# Altium PCB dub.PcbDoc
Units mm, origin at the board's own origin, x right, y up, seen from the top; angles counter-clockwise.
Board outline 100 x 100 mm, 2 copper layers (Top Layer, Bottom Layer); 47 components, 32 nets, 135 pads, 0 vias.
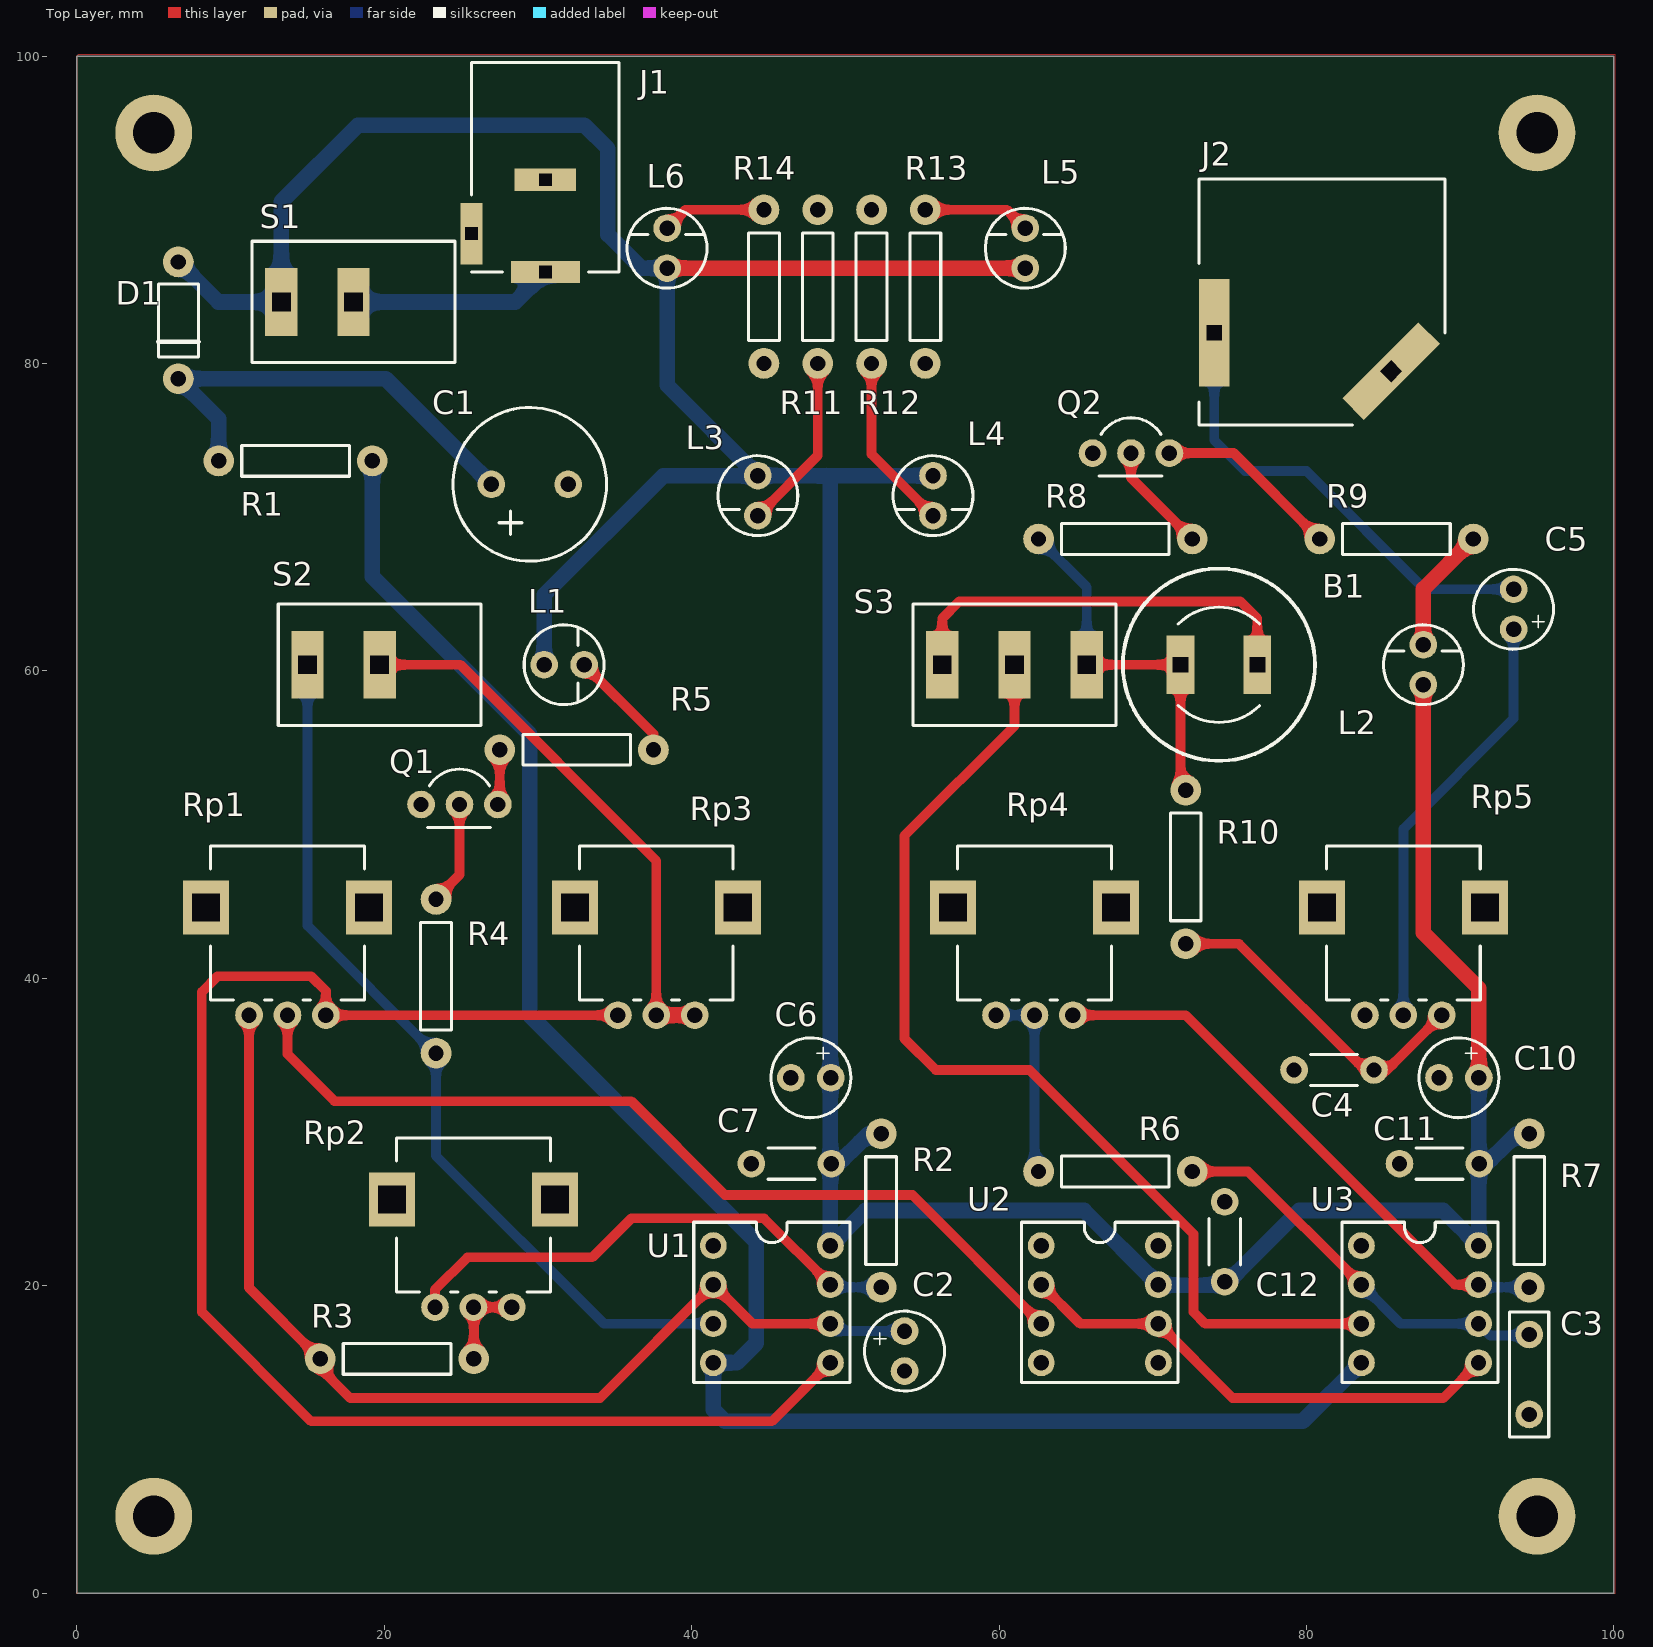
[diagram p0: Top Layer view]
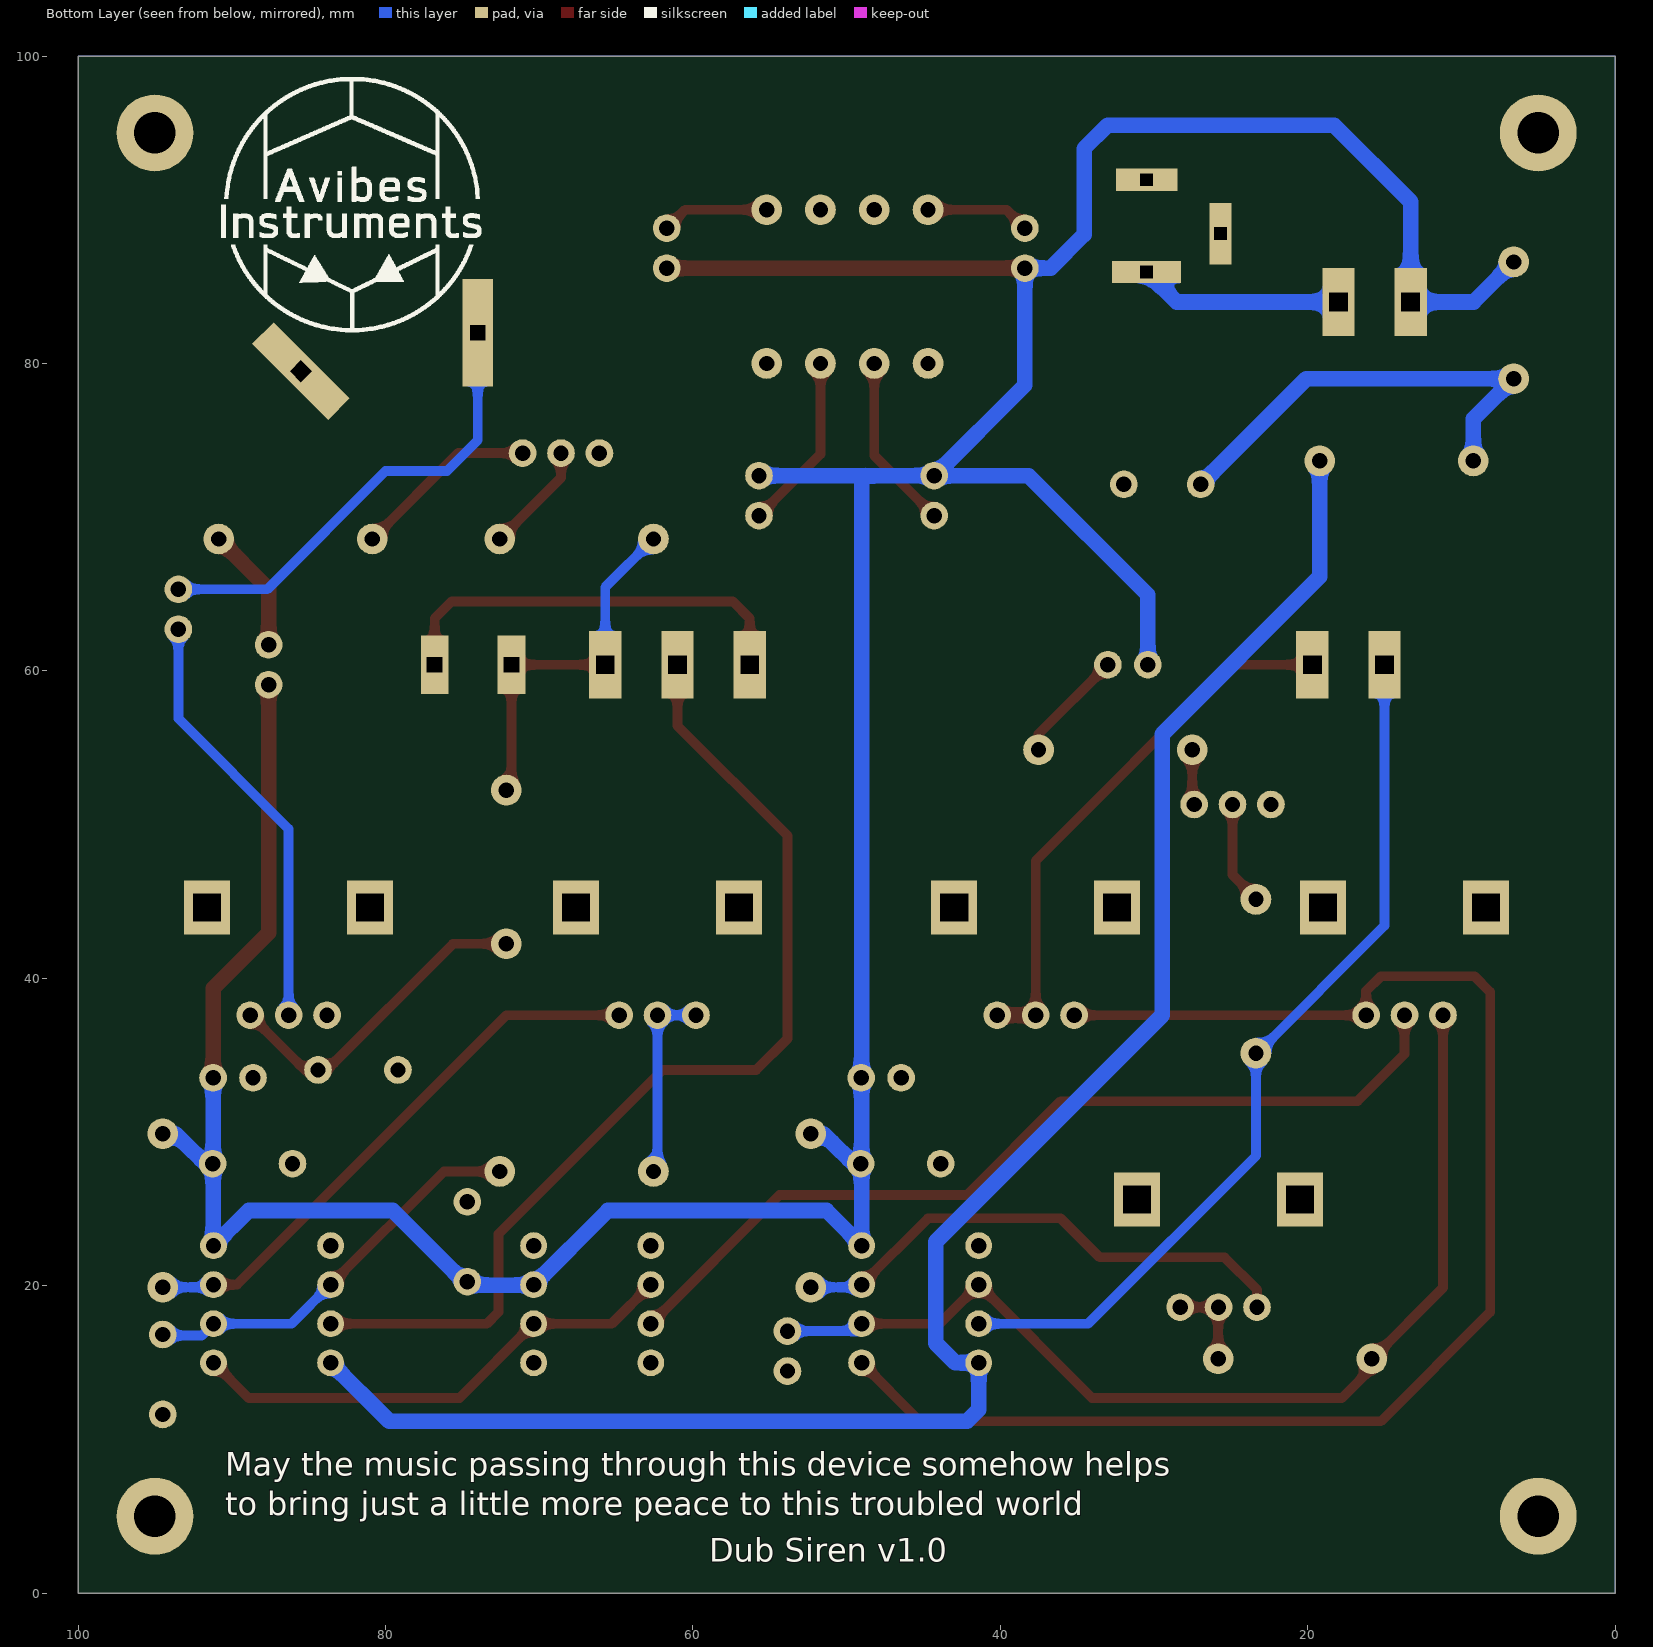
[diagram p1: Bottom Layer view, seen from below]
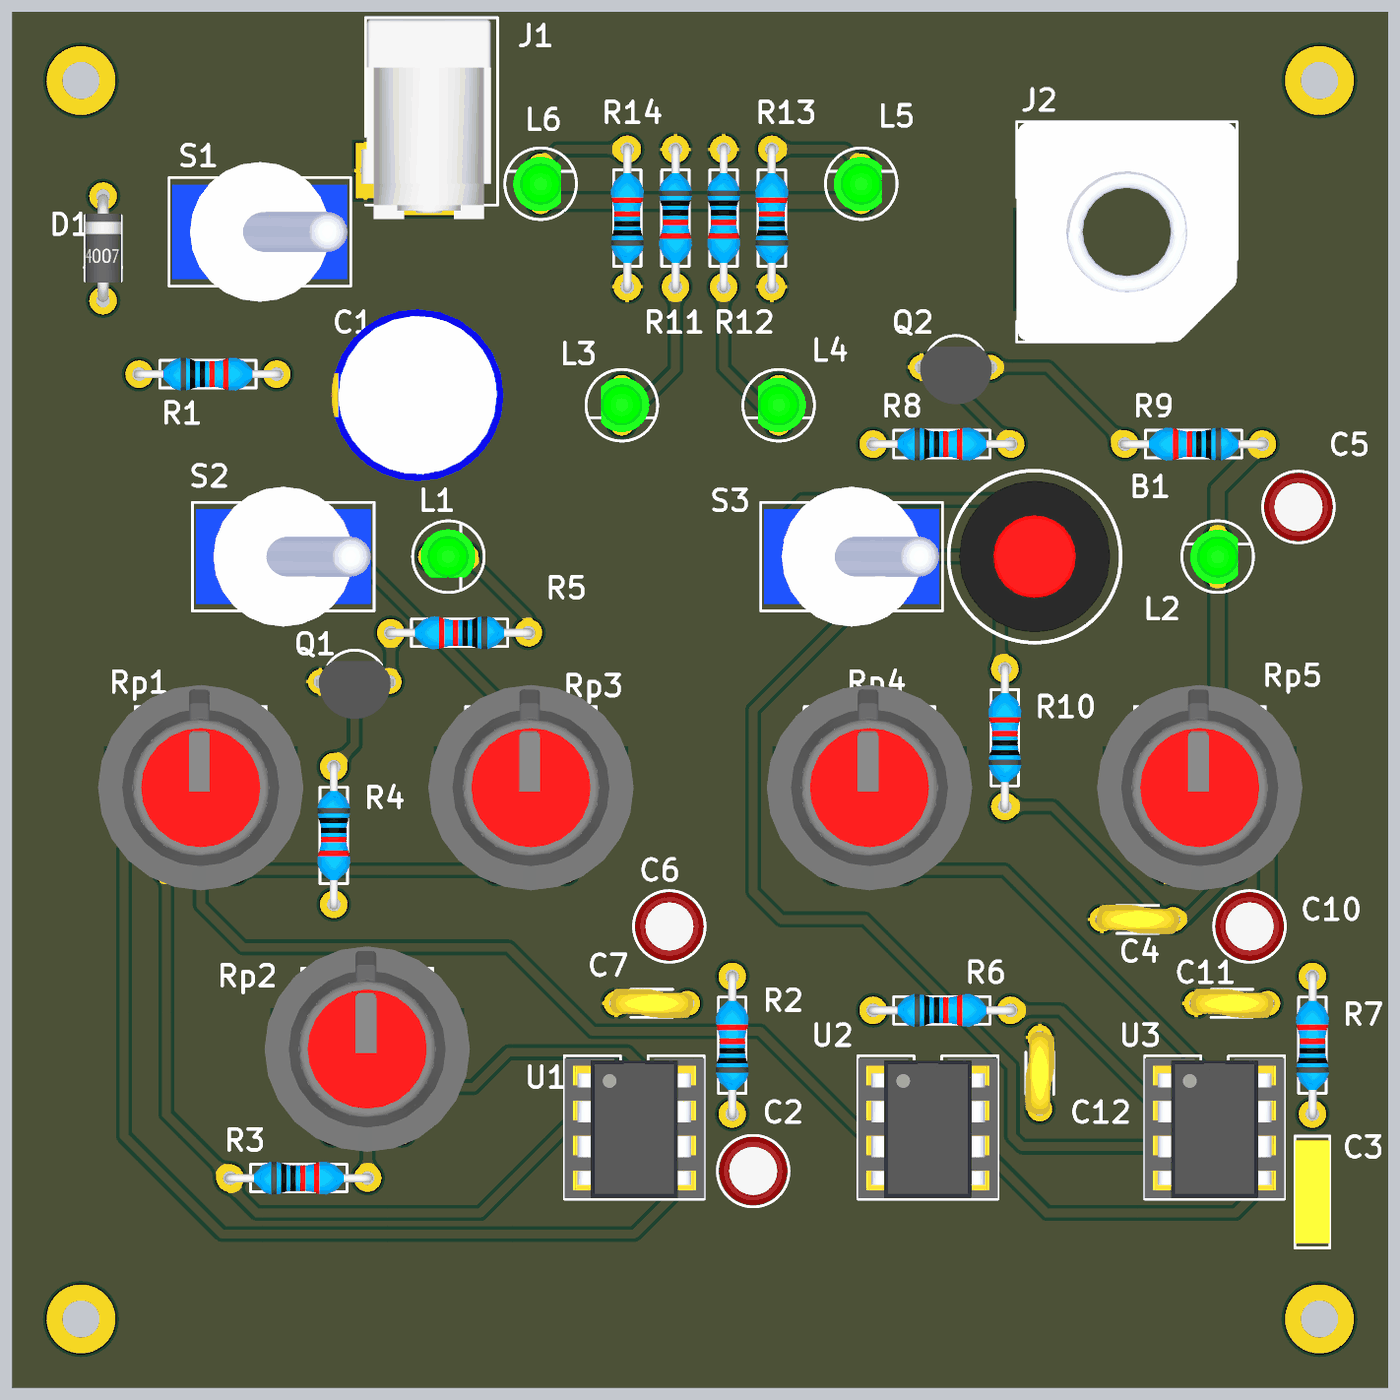
[diagram p2: 3D render of the assembled board from above, using the file's embedded part models]

## Layer stack, top to bottom
Top Solder: solder mask 0.0102, Solder Resist, Dk 3.5
Top Layer: signal copper 0.0356
Dielectric 1: dielectric 0.32, FR-4, Dk 4.8
Bottom Layer: signal copper 0.0356
Bottom Solder: solder mask 0.0102, Solder Resist, Dk 3.5

## Board outline
0,0 100,0 100,100 0,100

## Design rules (kind name [scope] priority, off if disabled: settings)
Clearance [All] p1: gap=0.254
Height [All] p1: minheight=0 maxheight=50.4 prefheight=12.7
HoleSize [All] p1: absolutevalues=TRUE maxlimit=50.8 minlimit=0.508 maxpercent=80.000 minpercent=20.000
MinimumSolderMaskSliver [All] p1: minsoldermaskwidth=0.406
PolygonConnect [All] p1: connectstyle=Relief reliefconductorwidth=0.254 reliefentries=4 polygonreliefangle="90 Angle" airgapwidth=0.254
RoutingVias [All] p1: holewidth=0.711 width=1.27 viastyle="Through Hole" minholewidth=0.711 minwidth=1.27 maxholewidth=0.711 maxwidth=1.27
SolderMaskExpansion [All] p1: expansion=0.102
Width [All] p1: maxlimit=1.27 minlimit=0.254 preferedwidth=0.635
27 further rules are at their usual default settings.

## Components (designator, comment, footprint, x,y, rotation, side; value= is the part's Value field where it differs from the comment)
B1 "SPST Momentary" SPSTM 74.3,60.4 r0 top locked
C1 "Capacitor Electrolitic" "AXIAL 0.5 - CAP ELECT" 29.464,72.136 r180 top
C2 "Capacitor Electrolitic" "AXIAL 0.26 - CAP ELECT" 53.848,15.748 r90 top
C3 "Capacitor" "AXIAL 5 - CAP CERAMIC" 94.488,14.224 r90 top
C4 "Capacitor" "AXIAL 5 - CAP LENTIL" 81.788,34.036 r0 top
C5 "Capacitor Electrolitic" "AXIAL 0.26 - CAP ELECT" 93.472,64.008 r270 top
C6 "Capacitor Electrolitic" "AXIAL 0.26 - CAP ELECT" 47.752,33.528 r0 top
C7 "Capacitor" "AXIAL 5 - CAP LENTIL" 46.482,27.94 r0 top
C10 "Capacitor Electrolitic" "AXIAL 0.26 - CAP ELECT" 89.916,33.528 r0 top
C11 "Capacitor" "AXIAL 5 - CAP LENTIL" 88.646,27.94 r0 top
C12 "Capacitor" "AXIAL 5 - CAP LENTIL" 74.676,22.86 r90 top
D1 "Diode" "AXIAL - 0.76 DIODE" 6.604,82.804 r270 top
J1 "DC power" "DC POWER" 30.48,91.948 r270 top
J2 "jack 1/4\" mono" "JACK 1/4\" MONO" 81,84 r0 top locked
L1 "LED" "AXIAL 0.26 - LED" 31.7,60.4 r0 top
L2 "LED" "AXIAL 0.26 - LED" 87.6,60.4 r90 top
L3 "LED" "AXIAL 0.26 - LED" 44.3,71.402 r270 top
L4 "LED" "AXIAL 0.26 - LED" 55.7,71.4 r270 top
L5 "LED" "AXIAL 0.26 - LED" 61.7,87.5 r90 top
L6 "LED" "AXIAL 0.26 - LED" 38.4,87.5 r90 top
Q1 "BC547" TO-92B 24.892,51.308 r180 top
Q2 "BC547" TO-92B 68.58,74.168 r180 top
R1 "Resistor" "AXIAL - 1.0" 14.224,73.66 r0 top
R2 "Resistor" "AXIAL - 1.0" 52.324,24.892 r90 top
R3 "Resistor" "AXIAL - 1.0" 20.828,15.24 r0 top
R4 "Resistor" "AXIAL - 1.0" 23.368,40.132 r270 top
R5 "Resistor" "AXIAL - 1.0" 32.512,54.864 r180 top
R6 "Resistor" "AXIAL - 1.0" 67.564,27.432 r0 top
R7 "Resistor" "AXIAL - 1.0" 94.488,24.892 r90 top
R8 "Resistor" "AXIAL - 1.0" 67.564,68.58 r0 top
R9 "Resistor" "AXIAL - 1.0" 85.852,68.58 r180 top
R10 "Resistor" "AXIAL - 1.0" 72.136,47.244 r90 top
R11 "Resistor" "AXIAL - 1.0" 48.2,85 r270 top
R12 "Resistor" "AXIAL - 1.0" 51.7,85 r270 top
R13 "Resistor" "AXIAL - 1.0" 55.2,85 r90 top
R14 "Resistor" "AXIAL - 1.0" 44.7,85 r90 top
Rp1 "RPot" "R0904N THONK" 13.7,37.6 r0 top
Rp2 "RPot" "R0904N THONK" 25.8,18.6 r0 top locked
Rp3 "RPot" "R0904N THONK" 37.7,37.6 r0 top locked
Rp4 "RPot" "R0904N THONK" 62.3,37.6 r0 top locked
Rp5 "RPot" "R0904N THONK" 86.3,37.6 r0 top locked
S1 "SPST switch" SPST 18,84 r180 top locked
S2 "SPST switch" SPST 19.7,60.4 r180 top locked
S3 "SPDT Switch" SPDT 61,60.4 r0 top locked
U1 "555 Timer" "8 PINS IC SOCKET" 45.212,18.796 r90 top
U2 "Operational Amplifier" "8 PINS IC SOCKET" 66.548,18.796 r90 top
U3 "555 Timer" "8 PINS IC SOCKET" 87.376,18.796 r90 top

## Footprints (in the part's own frame and the unit in brackets; to place one, negate y for a bottom-side part, rotate by r counter-clockwise, add the part's x,y. Pads: shape width x height; smd on the part's side, far side on the other; paste and mask are expansions set on the pad)
"8 PINS IC SOCKET" [mm]
  round 1.75 hole 1: 1(3.81,3.81) 2(1.27,3.81) 3(-1.27,3.81) 4(-3.81,3.81) 5(-3.81,-3.81) 6(-1.27,-3.81) 7(1.27,-3.81) 8(3.81,-3.81)
  silkscreen extent -5.08,-5.08 5.33,5.08, body extent -5,-5.08 5.16,5.08, height 7.6
"AXIAL 0.5 - CAP ELECT" [mm]
  round 1.8 hole 1: 1(-2.5,0) 2(2.5,0)
  silkscreen extent -5,-5 5,5, body extent -6.25,-6.25 6.26,6.25, height 17.02
"AXIAL 0.26 - CAP ELECT" [mm]
  round 1.8 hole 1: 1(-1.3,0) 2(1.3,0)
  silkscreen extent -2.6,-2.6 2.6,2.6, body extent -2.49,-2.5 2.5,2.5, height 11
"AXIAL 0.26 - LED" [mm]
  round 1.8 hole 1: 1(-1.3,0) 2(1.3,0)
  silkscreen extent -2.6,-2.6 2.6,2.6, body extent -2.02,-1.5 1.96,1.99, height 5.38
"AXIAL 5 - CAP CERAMIC" [mm]
  round 1.8 hole 1: 1(-2.6,0) 2(2.6,0)
  silkscreen extent -4.06,-1.27 4.06,1.27, body extent -3.75,-1.25 3.75,1.25, height 7
"AXIAL 5 - CAP LENTIL" [mm]
  round 1.8 hole 1: 1(-2.6,0) 2(2.6,0)
  silkscreen extent -1.52,-1.02 1.52,1.02, body extent -3,-1.05 3,1.05, height 8.1
"AXIAL - 0.76 DIODE" [mm]
  round 2 hole 1: 1(-3.8,0) 2(3.8,0)
  silkscreen extent -2.37,-1.3 2.37,1.31, body extent -3.92,-1.31 3.88,1.31, height 3.31
"AXIAL - 1.0" [mm]
  round 2 hole 1: 1(-5,0) 2(5,0)
  silkscreen extent -3.5,-1 3.5,1, body extent -5.38,-1.2 5.38,1.2, height 2.7
"DC POWER" [mm]
  rect 4x1.44 hole 0.8 square: 2(3.5,-4.8)
  rect 1.44x4 hole 0.8 square: 3(0,0)
  rect 1.44x4.5 hole 0.8 square: 4(6,0)
  silkscreen extent -7.62,-4.8 6,4.8, body extent -7.5,-5.1 7,4.3, height 11
"JACK 1/4\" MONO" [mm]
  rect 7x2 hole 1 square rot 45: 1(4.5,-4.5)
  rect 2x7 hole 1 square: 3(-7,-2)
  silkscreen extent -8,-8 8,8, body extent -8,-8 8,8, height 28.3
"R0904N THONK" [mm]
  round 1.8 hole 1: 1(-2.5,0) 2(0,0) 3(2.5,0)
  rect 3x3.5 hole 1.8 square: ""(-5.3,7) ""(5.3,7)
  silkscreen extent -5,1 5,11, body extent -7.46,-1.45 7.46,13.48, height 38.21
SPDT [mm]
  rect 2.1x4.4 hole 1.2 square: 1(0,0) 2(4.7,0) 3(-4.7,0)
  silkscreen extent -6.6,-3.95 6.6,3.95, body extent -6.35,-5.06 6.36,5.06, height 28.55
SPST [mm]
  rect 2.1x4.4 hole 1.2 square: 1(0,0) 2(4.7,0)
  silkscreen extent -6.6,-3.95 6.6,3.95, body extent -6.36,-5.06 6.35,5.06, height 28.55
SPSTM [mm]
  rect 1.8x3.8 hole 1 square: 1(-2.5,0) 2(2.5,0)
  silkscreen extent -6.25,-6.25 6.25,6.25, body extent -5.5,-5.5 5.5,5.5, height 20
TO-92B [mm]
  round 1.8 hole 1: 1(-2.5,0) 2(0,0) 3(2.5,0)
  silkscreen extent -2,-2.3 2.06,1.5, body extent -2.79,-1.5 2.79,2.7, height 8

## Part data
B1: library part SPSTM, "Push-to-make, SPST Momentary"
C1 C2 C5 C6 C10: "Aluminum Capacitor Electrolitic"
D1: library part 1N4001, "1.0A rectifier"
J1: "Jack DC 2.1mm, 3 contactos"
J2: "Conectores de audio 1/4\"JACK MTL NUT INSERT W/GRIP PTS"
L1 L2 L3 L4 L5 L6: "General purpose LED"
Q1 Q2: library part Transistor, "Standart transistor"
Rp1 Rp2 Rp3 Rp4 Rp5: "Potentiometer"
S1 S2: library part SPST, "Single Pole, Single Throw"
S3: library part SPDT, "Single Pole, Double Throw"
U1 U3: library part 555, "Accurate time delays or oscillation generator"
U2: library part LM741, "General purpose operational amplifier"

## Free pads (board coordinates)
  round 5 hole 2.7: 0(5,5) 0(5,95) 0(95,5) 0(95,95)

## Nets (pads, with @x,y where several pads share a name; then routed paths per layer and width w, separated by ;. In a path a pad name is that pad's centre, name@x,y a point inside that pad or via, vN(x,y) a via of type N, cw(c..) or ccw(c..) an arc to the next point about the centre after c; other vN are vias at no path point)
9V: C6.2 C7.2 C10.2 C11.2 C12.1 D1.1 L1.1 L2.1 L3.1 L4.1 L5.1 L6.1 R2.2 R7.2 S1.2 U1.8 U2.7 U3.8 | length 265.8
  Top Layer w1.016: L6.1 L5.1 ; U2.7 U2.7@70.388,20.036 ; L2.1 87.6,42.956 91.216,39.34 C10.2
  Bottom Layer w1.016: D1.1 9.208,84 S1.2 13.3,90.516 18.288,95.504 33.02,95.504 34.544,93.98 34.544,88.392 36.736,86.2 L6.1 38.4,78.6 L3.1 ; L1.1 30.4,64.944 38.156,72.7 L3.1 ; C7.2@49.052,27.432 51.512,29.892 R2.2 ; L4.1 48.768,72.7 ; U2.7 65.532,24.892 51.308,24.892 U1.8 49.022,72.446 48.768,72.7 ; U2.7@70.388,20.036 74.676,20.036 79.532,24.892 88.9,24.892 U3.8 91.216,22.636 C11.2@91.216,27.432 ; C10.2 C11.2@91.216,27.432 ; R7.2 93.676,29.892 C11.2@91.216,27.432 ; L3.1 48.768,72.7
"CONTROL MOD": U2.2 U2.6 U3.5 | length 32.4
  Top Layer w0.635: U2.2 65.278,17.526 U2.6 75.184,12.7 88.9,12.7 U3.5
GND: C1.1 C2.1 C3.1 C4.1 C6.1 C7.1 C10.1 C11.1 C12.2 J1.2 J1.3 J2.1 Q1.3 Q2.3 R11.1 R12.1 R13.1 R14.1 Rp5.1 U1.1 U3.1
MODULATION: Rp1.2 U2.3 | length 58.8
  Top Layer w0.635: Rp1.2 13.7,35.068 16.764,32.004 36.068,32.004 42.164,25.908 54.356,25.908 U2.3
NetB1_1: B1.1 R8.1 R10.2 S3.2 | length 23.5
  Top Layer w0.635: S3.2@66.04,60.4 B1.1 71.8,52.58 R10.2
  Bottom Layer w0.635: R8.1 65.7,65.444 S3.2
NetB1_2: B1.2 S3.3 | length 27.4
  Top Layer w0.635: S3.3 56.3,63.412 57.404,64.516 75.692,64.516 76.8,63.408 B1.2
NetC1_2: C1.2 D1.2 R1.1 | length 29.6
  Bottom Layer w1.016: R1.1 9.224,76.384 D1.2 20.096,79.004 C1.2
NetC5_1: C5.1 J2.3 | length 30.5
  Bottom Layer w0.635: J2.3 74,75 76,73 80,73 87.692,65.308 C5.1
NetC5_2: C5.2 Rp5.2 | length 28.1
  Bottom Layer w0.635: Rp5.2 86.3,49.724 93.472,56.896 C5.2
NetJ1_4: J1.4 S1.1 | length 13.3
  Bottom Layer w1.016: S1.1 28.532,84 J1.4
NetL1_2: L1.2 R5.1 | length 7.4
  Top Layer w0.635: L1.2 37.512,55.888 R5.1
NetL2_2: L2.2 R9.1 | length 8.2
  Top Layer w1.016: L2.2 87.6,65.328 R9.1
NetL3_2: L3.2 R11.2 | length 11.5
  Top Layer w0.635: L3.2@44.3,70.1 48.2,74 R11.2
NetL4_2: L4.2 R12.2 | length 11.6
  Top Layer w0.635: R12.2 51.7,74.1 L4.2
NetL5_2: L5.2 R13.2 | length 7
  Top Layer w0.635: R13.2 60.5,90 L5.2
NetL6_2: L6.2 R14.2 | length 6.8
  Top Layer w0.635: L6.2 39.6,90 R14.2
NetQ1_1: Q1.1 R5.2 | length 3.6
  Top Layer w0.635: Q1.1@27.512,51.428 R5.2
  Top Layer w1.016: Q1.1 Q1.1@27.512,51.428
NetQ1_2: Q1.2 R4.1 | length 6.8
  Top Layer w0.635: R4.1@23.328,45.172 24.892,46.736 Q1.2
NetQ2_1: Q2.1 R9.2 | length 12.1
  Top Layer w0.635: Q2.1 75.264,74.168 R9.2
NetQ2_2: Q2.2 R8.2 | length 7.2
  Top Layer w0.635: Q2.2 68.58,72.564 R8.2
NetR2_1: R2.1 Rp2.1 U1.7 | length 34
  Top Layer w0.635: Rp2.1 23.3,19.744 25.4,21.844 33.528,21.844 36.068,24.384 44.704,24.384 U1.7
  Bottom Layer w0.635: U1.7@49.196,19.892 R2.1
  Bottom Layer w1.016: U1.7 U1.7@49.196,19.892
NetR3_2: R3.2 Rp2.2 Rp2.3 | length 5.9
  Top Layer w0.635: R3.2 25.828,18.572 Rp2.2 Rp2.3
NetR4_2: R4.2 S2.2 U1.3 | length 58
  Bottom Layer w0.635: S2.2 15,43.42 23.368,35.052 23.368,28.448 34.29,17.526 U1.3
NetR6_1: R6.1 Rp4.1 Rp4.2 | length 12.8
  Bottom Layer w0.635: Rp4.1 Rp4.2 ; Rp4.2@62.3,37.592 62.3,27.696 R6.1
NetR7_1: R7.1 Rp4.3 U3.7 | length 37
  Top Layer w0.635: Rp4.3 72.128,37.6 89.662,20.066 U3.7
  Bottom Layer w0.635: U3.7@91.36,19.892 R7.1
  Bottom Layer w1.016: U3.7 U3.7@91.36,19.892
NetRp3_2: Rp3.2 Rp3.3 S2.1 | length 35.8
  Top Layer w0.635: S2.1 24.944,60.4 37.7,47.644 Rp3.2
  Top Layer w1.016: Rp3.2 Rp3.3
NetS3_1: S3.1 U3.3 | length 67.7
  Top Layer w0.635: S3.1 61,56.428 53.848,49.276 53.848,36.068 55.88,34.036 61.976,34.036 72.644,23.368 72.644,18.288 73.406,17.526 U3.3
OUT: C4.2 R10.1 Rp5.3 | length 21.5
  Top Layer w0.635: R10.1 75.612,42.244 83.82,34.036 C4.2 85.236,34.036 Rp5.3
RESET: R1.2 U1.4 U3.4 | length 118.2
  Bottom Layer w1.016: R1.2 19.224,66.12 29.464,55.88 29.464,37.592 44.196,22.86 44.196,16.256 42.926,14.986 U1.4 41.402,11.938 42.164,11.176 79.756,11.176 U3.4
TRIGGER1: C2.2 R3.1 Rp1.1 U1.2 U1.6 | length 68
  Top Layer w0.635: Rp1.1 11.2,19.868 R3.1 15.828,14.652 17.78,12.7 34.036,12.7 U1.2 43.942,17.526 U1.6
  Bottom Layer w0.635: U1.6 49.5,17.048 C2.2
TRIGGER2: C3.2 R6.2 U3.2 U3.6 | length 26.3
  Top Layer w0.635: R6.2 76.2,27.432 U3.2
  Bottom Layer w0.635: U3.2 86.106,17.526 U3.6 91.948,16.764 C3.2@94.488,16.764
VCONTROL: Rp1.3 Rp3.1 U1.5 | length 95.7
  Top Layer w0.635: Rp3.1 Rp1.3 16.2,39.172 15.24,40.132 9.144,40.132 8.128,39.116 8.128,18.288 15.24,11.176 45.212,11.176 U1.5
pads on no net: Rp1. Rp2. Rp3. Rp4. Rp5. U2.1 U2.4 U2.5 U2.8

## Polygon pours and split planes (outlines as drawn)
GND on Top Layer "Top Layer - GND" (solid, remove dead copper, shelved, pour order 3): 100.076,0 100.076,100.076 0.076,100.076 0,100 0,0
GND on Bottom Layer "Bottom Layer - GND" (solid, remove dead copper, shelved, pour order 5): 0,100 100,100 100,0 0,0

## Silkscreen, mask and mechanical layers (free items; w line width, h text height)
Bottom Overlay:
  drawing of 3979 lines, arcs and shapes, not listed
  text "May the music passing through this device somehow helps" at 90.424,7.62 h1.52
  text "to bring just a little more peace to this troubled world" at 90.424,5.08 h1.52
  text "Dub Siren v1.0" at 58.928,2.032 h1.52
Boarder Outline:
  the board outline again, w0.635

## Dimensions
0,100 to 100,100 on Mechanical 13